# Altium PCB Digital_Ammeter.PcbDoc
Units mm, origin at the board's own origin, x right, y up, seen from the top; angles counter-clockwise.
Board outline 78.87 x 46.74 mm, 2 copper layers (Top Layer, Bottom Layer); 34 components, 99 nets, 139 pads, 6 vias.
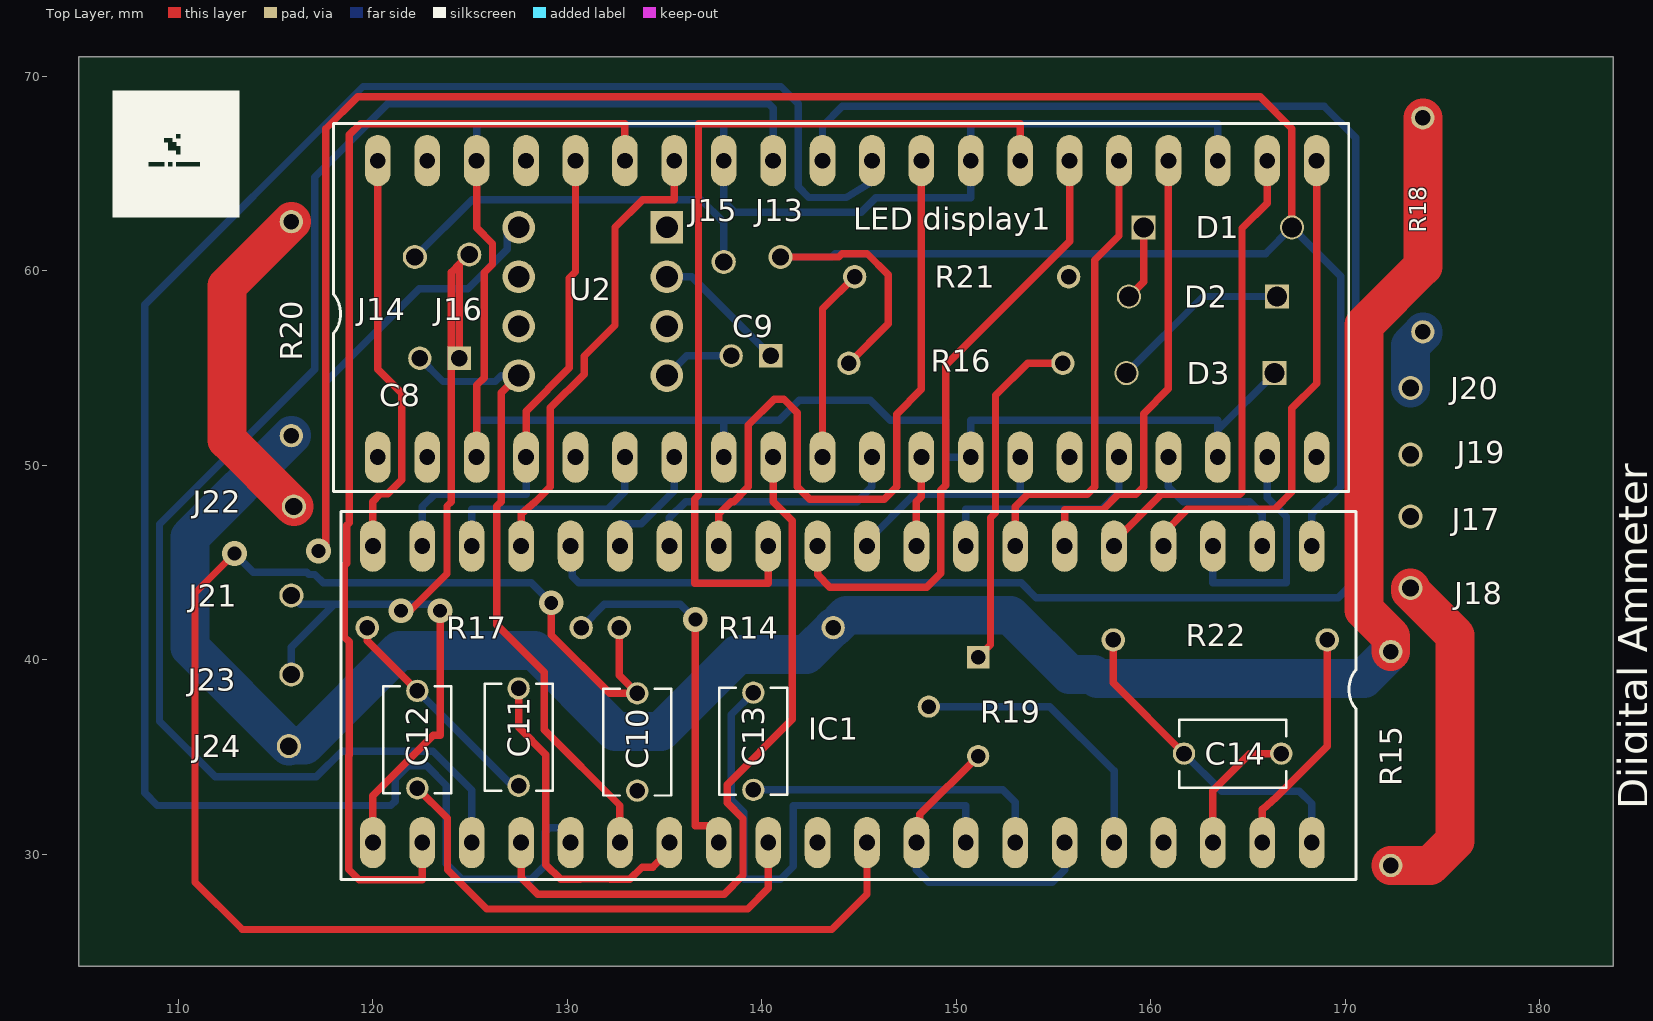
[diagram p0: Top Layer view]
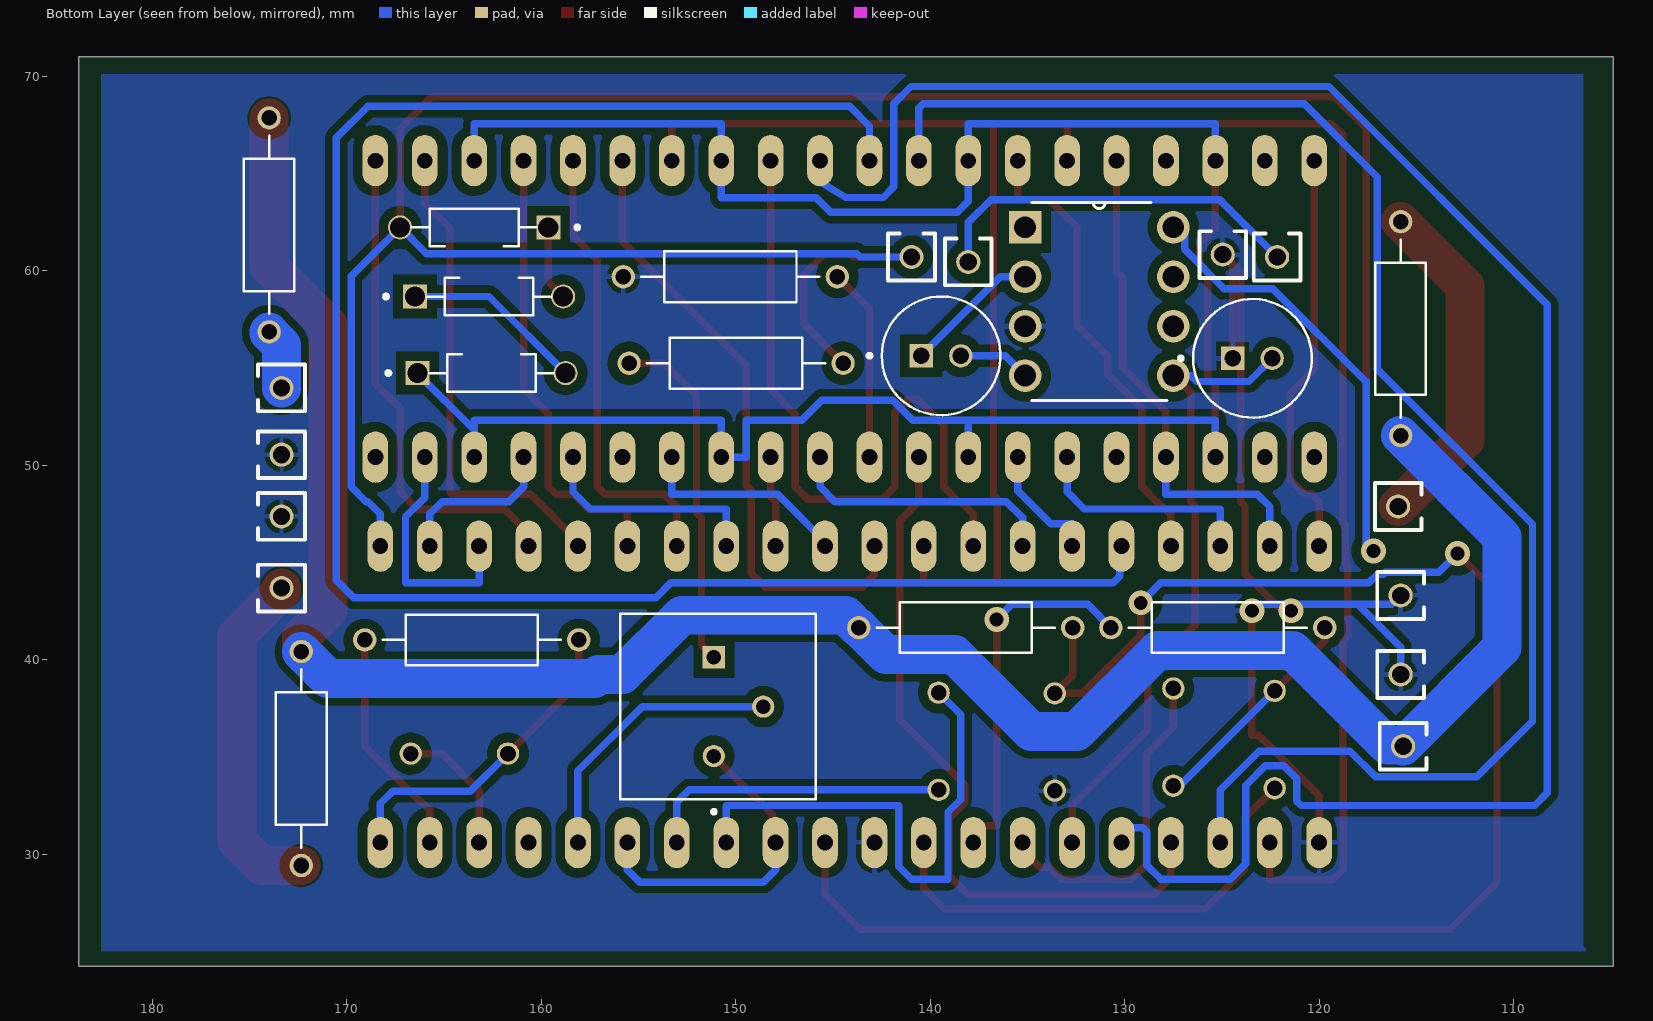
[diagram p1: Bottom Layer view, seen from below]
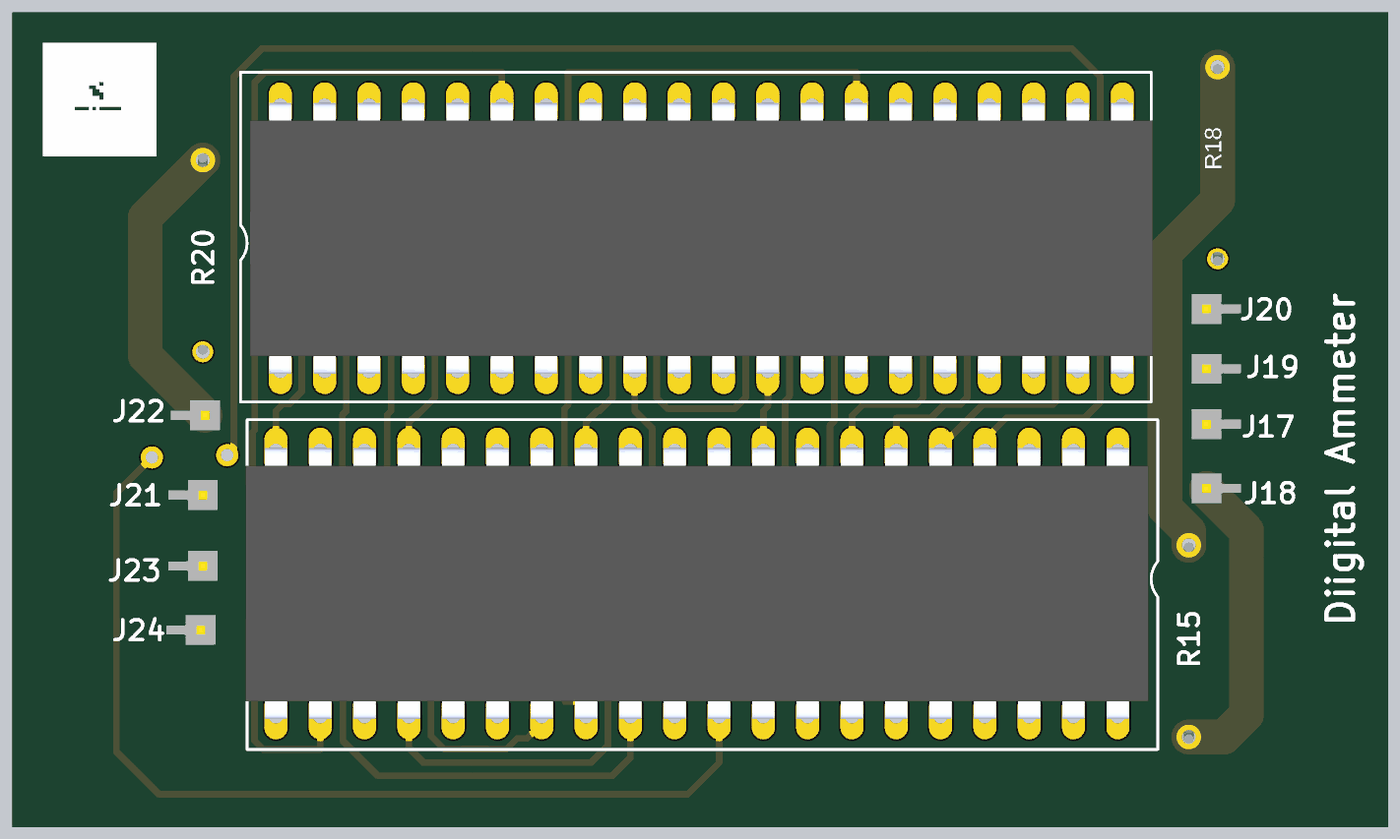
[diagram p2: 3D render of the assembled board from above, using the file's embedded part models]

## Layer stack, top to bottom
Top Solder: solder mask 0.0102, Solder Resist, Dk 3.5
Top Layer: signal copper 0.0356
Dielectric 1: dielectric 0.32, FR-4, Dk 4.8
Bottom Layer: signal copper 0.0356
Bottom Solder: solder mask 0.0102, Solder Resist, Dk 3.5

## Board outline
104.902,24.257 183.769,24.257 183.769,70.993 104.902,70.993

## Design rules (kind name [scope] priority, off if disabled: settings)
Clearance [All] p1: gap=0.5 ignorepadtopadclearanceinfootprint=FALSE except(0.381: Arc-Arc Arc-Track Arc-SMDPad Arc-THPad Arc-Via Arc-Fill Arc-Poly Arc-Region Arc-Text Track-Track Track-SMDPad Track-THPad Track-Via Track-Fill Track-Poly Track-Region Track-Text; 0.508: Arc-Hole Track-Hole SMDPad-Hole THPad-Hole Via-Hole Fill-Hole Poly-Hole Region-Hole Text-Hole)
HoleToHoleClearance [All] p1: gap=0.5 allowstackedmicrovias=TRUE
PolygonConnect [All] p1: connectstyle=Relief reliefconductorwidth=0.254 reliefentries=4 polygonreliefangle="90 Angle" airgapwidth=0.254
RoutingVias [All] p1: holewidth=0.711 width=1.27 viastyle="Through Hole" minholewidth=0.711 minwidth=1.27 maxholewidth=0.711 maxwidth=1.27
SilkToSolderMaskClearance [IsPad] p1 off: minsilkscreentomaskgap=0.254 clearancetoexposedcopper=FALSE
SolderMaskExpansion [All] p1: expansion=0.102 istentingtop=FALSE
Width [All] p1: maxlimit=3 minlimit=0.254 preferedwidth=0.381
28 further rules are at their usual default settings.

## Components (designator, comment, footprint, x,y, rotation, side; value= is the part's Value field where it differs from the comment)
C8 "100 uF" CAPPRD500W60D1250H2000 123.444,55.499 r0 top value=$0.77
C9 "100 uF" CAPPRD500W60D1250H2000 139.446,55.626 r0 top value=$0.77
C10 "10nF" CAPRB500W50L550T350H600 133.604,35.774 r90 top value=$0.51
C11 "0.22uF" CAPRB500W50L550T350H600 127.508,36.028 r90 top value=$0.51
C12 "0.47uF" CAPRB500W50L550T350H600 122.301,35.901 r90 top value=$0.51
C13 "100nF" CAPRB500W50L550T350H600 139.573,35.814 r90 top value=$0.51
C14 "100pF" CAPRB500W50L550T350H600 164.211,35.179 r180 top value=$0.51
D1 "1N4148" DIOAD829W49L456D191 163.449,62.23 r0 top value=$0.05
D2 "1N4148" DIOAD829W49L456D191 162.687,58.674 r180 top value=$0.05
D3 "1N4148" DIOAD829W49L456D191 162.56,54.737 r180 top value=$0.05
IC1 "ICL7107CPLZ" DIL40 144.145,38.227 r180 top value=$11.2
J13 "SWT" SAMTEC_MTMM-101-XX-X-S-XXX 140.97,60.706 r0 top
J14 "VCC" SAMTEC_MTMM-101-XX-X-S-XXX 122.174,60.706 r0 top
J15 "SWT" SAMTEC_MTMM-101-XX-X-S-XXX 138.049,60.452 r0 top
J16 "GND" SAMTEC_MTMM-101-XX-X-S-XXX 124.968,60.833 r0 top
J17 "GND" SAMTEC_MTMM-101-XX-X-S-XXX 173.355,47.371 r270 top
J18 "GND" SAMTEC_MTMM-101-XX-X-S-XXX 173.355,43.688 r270 top
J19 "GND" SAMTEC_MTMM-101-XX-X-S-XXX 173.355,50.546 r270 top
J20 "GND" SAMTEC_MTMM-101-XX-X-S-XXX 173.355,53.975 r270 top
J21 "GND" SAMTEC_MTMM-101-XX-X-S-XXX 115.824,43.307 r90 top
J22 "GND" SAMTEC_MTMM-101-XX-X-S-XXX 115.951,47.879 r90 top
J23 "OUT" SAMTEC_MTMM-101-XX-X-S-XXX 115.824,39.243 r90 top
J24 "IN" SAMTEC_MTMM-101-XX-X-S-XXX 115.697,35.56 r90 top
"LED display1" "" DIL40 144.399,58.039 r0 top
R14 "1M" RESAD1100W55L680D260 138.176,41.656 r180 top value=$0.05
R15 "0.01" RESAD1100W55L680D260 172.339,34.925 r90 top value=$0.05
R16 "15K" RESAD1100W55L680D260 149.987,55.245 r180 top value=$0.05
R17 "47K" RESAD1100W55L680D260 125.222,41.656 r180 top value=$0.05
R18 "0.1" RESAD1100W55L680D260 173.99,62.357 r90 top value=$0.05
R19 "10K" TRIM_3296P-1-502LF 151.13,37.592 r90 top value=$1.92
R20 "1" RESAD1100W55L680D260 115.824,57.023 r270 top value=$0.05
R21 "330E" RESAD1100W55L680D260 150.28,59.69 r180 top value=$0.05
R22 "100K" RESAD1100W55L680D260 163.576,41.021 r180 top value=$0.05
U2 "ICL7660SCPAZ" DIP254P762X533-8 135.128,54.61 r0 top value=$2.12

## Footprints (in the part's own frame and the unit in brackets; to place one, negate y for a bottom-side part, rotate by r counter-clockwise, add the part's x,y. Pads: shape width x height; smd on the part's side, far side on the other; paste and mask are expansions set on the pad)
CAPPRD500W60D1250H2000 [mm]
  round 1.2 hole 0.85: N(-1.016,0)
  rect 1.2x1.2 hole 0.85: P(1.016,0)
  body extent -2.52,-2.34 2.52,2.67, height 0.79
CAPRB500W50L550T350H600 [mm]
  round 1.15 hole 0.8: 1(-2.5,0) 2(2.5,0)
  silkscreen extent -2.75,-1.75 2.75,1.75, body extent -2.88,-1.91 2.62,1.59, height 0.19
DIL40 [mil]
  oval 52x104 hole 32: 1(-950,-300) 2(-850,-300) 3(-750,-300) 4(-650,-300) 5(-550,-300) 6(-450,-300) 7(-350,-300) 8(-250,-300) 9(-150,-300) 10(-50,-300) 11(50,-300) 12(150,-300) 13(250,-300) 14(350,-300) 15(450,-300) 16(550,-300) 17(650,-300) 18(750,-300) 19(850,-300) 20(950,-300) 21(950,300) 22(850,300) 23(750,300) 24(650,300) 25(550,300) 26(450,300) 27(350,300) 28(250,300) 29(150,300) 30(50,300) 31(-50,300) 32(-150,300) 33(-250,300) 34(-350,300) 35(-450,300) 36(-550,300) 37(-650,300) 38(-750,300) 39(-850,300) 40(-950,300)
  silkscreen extent -1040,-370 1015,375, body extent -1019,-306 1019,306, height 351
DIOAD829W49L456D191 [mm]
  round 1.238 hole 1.035 mask+0.102: A(3.81,0)
  rect 1.238x1.238 / inner round 1.238 / far side rect 1.238x1.238 hole 1.035: C(-3.81,0)
  body extent -4.29,-1 4.19,1, height 0.86
DIP254P762X533-8 [mil]
  rect 66x66 / inner round 66 / far side rect 66x66 hole 44: 1(0,300)
  round 66 hole 44: 2(0,200) 3(0,100) 4(0,0) 5(-300,0) 6(-300,100) 7(-300,200) 8(-300,300)
  body extent -306,-44 5,334, height 100
RESAD1100W55L680D260 [mm]
  round 1.2 hole 0.8: 1(-5.5,0) 2(5.5,0)
  body extent -5.9,-1.3 5.65,1.3, height 0.26
SAMTEC_MTMM-101-XX-X-S-XXX [mm]
  round 1.24 hole 0.89: 01(0,0)
  body extent -1,-1 1,1, height 1.85
TRIM_3296P-1-502LF [mm]
  rect 1.14x1.14 hole 0.74: 1(2.54,0)
  round 1.14 hole 0.74: 2(0,2.54) 3(-2.54,0)
  body extent -4.7,-5.25 4.83,6.3, height 1.72

## Part data
C8 C9: library part ECA2WM100B, "CAP ALUM 10UF 20% 450V RADIAL", Package="RADIAL-2 Panasonic", Availability="In Stock", Check_prices=https://www.snapeda.com/parts/ECA-2WM100B/Panasonic/view-part/2313535/?ref=eda, MF=Panasonic, MP=ECA-2WM100B, Price=None, Purchase-URL=https://pricing.snapeda.com/search/part/ECA-2WM100B/?ref=eda, SnapEDA_Link=https://www.snapeda.com/parts/ECA-2WM100B/Panasonic/view-part/2313535/?ref=snap, Supplier 1=Mouser, Supplier 2=Mouser
C10 C11 C12 C13 C14: library part FG26X7R2E104KNT06, "0.1ÂµF Â±10% 250V Ceramic Capacitor X7R Radial", Package="Radial TDK", Availability="In Stock", Check_prices=https://www.snapeda.com/parts/FG26X7R2E104KNT06/TDK/view-part/?ref=eda, MF=TDK, MP=FG26X7R2E104KNT06, Price=None, Purchase-URL=https://pricing.snapeda.com/search/part/FG26X7R2E104KNT06/?ref=eda, SnapEDA_Link=https://www.snapeda.com/parts/FG26X7R2E104KNT06/TDK/view-part/?ref=snap, Supplier 1=Mouser
D1 D2 D3: "Diode Standard 75V 200mA Surface Mount SOD-523F", Package="AXIAL LEAD-2 ON Semiconductor", Availability="In Stock", Check_prices=https://www.snapeda.com/parts/1N4148/Onsemi/view-part/?ref=eda, MF="ON Semiconductor", MP=1N4148, Price=None, Purchase-URL=https://pricing.snapeda.com/search/part/1N4148/?ref=eda, SnapEDA_Link=https://www.snapeda.com/parts/1N4148/Onsemi/view-part/?ref=snap, Supplier 1="Arrow Electronics", Supplier 2=Rs
IC1: "Display Driver 3.5 Digit 40-DIP", Package="DIP-40 Intersil", Supplier Part Number 1=968-ICL7107CPLZ, ComponentLink1Description="New link", Digi-Key_Part_Number=ICL7107CPLZ-ND, Digi-Key_Purchase_URL=https://www.digikey.in/product-detail/en/renesas-electronics-america-inc/ICL7107CPLZ/ICL7107CPLZ-ND/821475?utm_source=snapeda&utm_medium=aggregator&utm_campaign=symbol, MF="Renesas Electronics", MP=ICL7107CPLZ, SnapEDA_Link=https://www.snapeda.com/parts/ICL7107CPLZ/Renesas%20Electronics%20America%20Inc./view-part/45306/?ref=snap, Supplier 1=Mouser
J13 J14 J15 J16 J17 J18 J19 J20 J21 J22 J23 J24: library part MTMM-101-XX-X-S-XXX, "Connector Header position", Package=None, Availability=Unavailable, MP=MTMM-101-XX-X-S-XXX, Price=None
"LED display1": library part "7 segmented display", "DISPLAY 7SEG 0.56\" SGL GRN 10DIP x4", part name=LDSC512RI, Supplier Part Number 1=696-LDS-C512RI, check price=https://www.snapeda.com/parts/LDSC512RI/Lumex%20Optoelectronics/view-part/?ref=search&t=LDSC512RI, ComponentLink1Description=link, ComponentLink1URL=https://www.snapeda.com/parts/LDSC512RI/Lumex%20Optoelectronics/view-part/?ref=search&t=LDSC512RI, MP="Lumex Optoelectronics", Supplier 1=Mouser
R14 R15 R16 R17 R18 R20 R21 R22: library part MFR-25FBF52-1K, "1.78 kOhms Â±1% 0.25W, 1/4W Through Hole Resistor Axial - Metal Film", Package="Axial Yageo", Supplier Part Number 1=588-EY470KE, Availability="In Stock", Check_prices=https://www.snapeda.com/parts/MFR-25FBF52-1K/Yageo/view-part/?ref=eda, MF=Yageo, MP=MFR-25FBF52-1K, Price=None, Purchase-URL=https://pricing.snapeda.com/search/part/MFR-25FBF52-1K/?ref=eda, SnapEDA_Link=https://www.snapeda.com/parts/MFR-25FBF52-1K/Yageo/view-part/?ref=snap, Supplier 1=Mouser
R19: library part 3296P-1-502LF, "Trimmer Cermet 5 kOhm linear 500 mW", Package="NON-STANDARD-3 Bourns", Availability="In Stock", Check_prices=https://www.snapeda.com/parts/3296P-1-502LF/Bourns/view-part/?ref=eda, MF=Bourns, MP=3296P-1-502LF, Price=None, Purchase-URL=https://pricing.snapeda.com/search/part/3296P-1-502LF/?ref=eda, SnapEDA_Link=https://www.snapeda.com/parts/3296P-1-502LF/Bourns/view-part/?ref=snap, Supplier 1=Rs
U2: "Charge Pump Switching Regulator IC Positive or Negative Fixed -Vin, 2Vin 1 Output 45mA 8-DIP (0.300, 7.62mm)", Package="DIP-8 Renesas / Intersil", Supplier Part Number 1=9215585P, Availability="In Stock", Check_prices=https://www.snapeda.com/parts/ICL7660SCPAZ/Renesas/view-part/?ref=eda, MF="Renesas Electronics America Inc", MP=ICL7660SCPAZ, Price=None, Purchase-URL=https://pricing.snapeda.com/search/part/ICL7660SCPAZ/?ref=eda, SnapEDA_Link=https://www.snapeda.com/parts/ICL7660SCPAZ/Renesas/view-part/?ref=snap, Supplier 1=Rs

## Via types
v1: diameter 1.27, hole 0.711, Top Layer to Bottom Layer, 6 vias

## Nets (pads, with @x,y where several pads share a name; then routed paths per layer and width w, separated by ;. In a path a pad name is that pad's centre, name@x,y a point inside that pad or via, vN(x,y) a via of type N, cw(c..) or ccw(c..) an arc to the next point about the centre after c; other vN are vias at no path point)
+VCC: D1.A IC1.1 J13.01 R16.2 U2.8 | length 157.2
  Top Layer w0.381: v1@117.475,45.466 117.602,45.593 117.602,67.31 119.228,68.936 165.633,68.936 167.259,67.31 D1.A ; J13.01 143.967,60.706 144.145,60.884 145.415,60.884 146.507,59.792 146.507,57.265 R16.2
  Bottom Layer w0.381: v1@117.475,45.466 117.602,45.593 117.602,54.284 122.398,59.08 124.905,59.08 126.924,61.099 126.924,62.23 U2.8 ; J13.01 143.612,60.706 143.789,60.884 165.913,60.884 D1.A 169.774,59.715 169.774,48.895 169.012,48.133 168.91,48.133 168.275,47.498 IC1.1
  other v1: 117.221,45.593
GND: C8.P C10.1 IC1.21 IC1.30 J16.01 J17.01 J19.01 J21.01 J23.01 R21.1 U2.3 | length 51.4
  Top Layer w0.381: IC1.21 120.015,33.02 123.114,36.119 123.469,36.119 v1(123.469,42.52) ; v1(121.463,42.52) 121.92,42.52 123.825,44.425 123.825,47.904 124.054,48.133 124.054,59.919 124.46,60.325 ; C8.P 124.46,60.325 ; J16.01 124.46,60.325
  Bottom Layer w0.381: J23.01 115.824,40.64 118.034,42.85 ; J21.01 116.281,42.85 118.034,42.85 ; v1(121.463,42.52) v1@121.133,42.85 ; v1(123.469,42.52) 123.139,42.85 v1@121.133,42.85 ; 118.034,42.85 v1@121.133,42.85
NetC1_N: 
NetC2_N: 
NetC2_P: 
NetC3_1: 
NetC3_2: 
NetC4_1: 
NetC5_1: 
NetC5_2: 
NetC6_1: 
NetC6_2: 
NetC7_1: 
NetC7_2: 
NetC8_N: C8.N IC1.26 U2.5 | length 32.8
  Top Layer w0.381: U2.5 126.619,53.721 126.619,48.133 126.39,47.904 126.39,41.808 128.829,39.37 128.829,36.398 132.715,32.512 IC1.26
  Bottom Layer w0.381: C8.N 123.622,54.305 126.314,54.305 126.619,54.61 U2.5
NetC9_N: C9.N U2.4 | length 3.7
  Bottom Layer w0.381: U2.4 136.144,55.626 C9.N
NetC9_P: C9.P U2.2 | length 7
  Bottom Layer w0.381: U2.2 136.398,59.69 C9.P
NetC10_2: C10.2 IC1.31 R14.2 | length 85.4
  Top Layer w0.381: v1(112.903,45.466) 110.871,43.434 110.871,28.575 113.309,26.137 143.612,26.137 145.415,27.94 IC1.31 ; v1(129.184,42.926) 129.184,41.275 132.185,38.274 C10.2 132.676,39.202 R14.2
  Bottom Layer w0.381: v1@113.073,45.636 v1(112.903,45.466) 113.87,44.499 116.609,44.499 116.721,44.386 117.03,44.386 117.462,43.955 128.145,43.955 128.15,43.96 v1(129.184,42.926)
NetC11_1: C11.1 C12.2 R17.2 | length 11.5
  Top Layer w0.381: R17.2 119.722,40.98 C12.2
  Bottom Layer w0.381: C12.2 127.174,33.528 C11.1
NetC11_2: C11.2 IC1.27 | length 17.3
  Top Layer w0.381: C11.2 127.508,36.525 128.905,35.128 128.905,29.474 129.665,28.715 130.685,28.715 130.702,28.731 132.188,28.731 132.205,28.715 133.225,28.715 133.848,29.337 134.391,29.337 135.255,30.201 IC1.27
NetC12_1: C12.1 IC1.29 | length 25
  Top Layer w0.381: C12.1 123.85,31.852 123.85,29.21 125.87,27.191 139.277,27.191 140.335,28.248 IC1.29
NetC13_1: C13.1 IC1.34 | length 15.8
  Bottom Layer w0.381: C13.1 152.4,33.314 153.035,32.679 IC1.34
NetC13_2: C13.2 IC1.33 | length 27.1
  Bottom Layer w0.381: C13.2 138.426,37.168 138.426,32.839 139.09,32.175 139.09,28.715 140.97,28.715 141.63,29.375 141.63,32.512 150.495,32.512 IC1.33
NetC14_1: C14.1 IC1.38 | length 7
  Top Layer w0.381: IC1.38 163.195,33.274 165.1,35.179 C14.1
NetC14_2: C14.2 IC1.40 R22.2 | length 17
  Top Layer w0.381: R22.2 158.076,38.814 C14.2
  Bottom Layer w0.381: C14.2 163.641,33.249 167.64,33.249 168.275,32.614 IC1.40
NetD1_C: D1.C D2.A | length 3.9
  Top Layer w0.381: D2.A 159.639,59.436 D1.C
NetD2_C: D2.C D3.A | length 9.4
  Bottom Layer w0.381: D3.A 162.687,58.674 D2.C
NetD3_C: "LED display1.3" "LED display1.8" "LED display1.13" "LED display1.18" "LED display1.23" "LED display1.28" "LED display1.33" "LED display1.38" D3.C | length 118.8
  Top Layer w0.381: 125.349,50.419 125.349,54.127 125.73,54.508 125.73,59.91 126.162,60.342 126.162,61.392 125.349,62.205 125.349,65.659
  Bottom Layer w0.381: 125.349,50.419 125.349,52.324 138.049,52.311 ; 125.349,65.659 125.349,67.564 138.049,67.564 138.049,65.659 138.049,63.576 138.62,63.005 145.123,63.005 145.872,63.754 150.749,63.754 150.749,65.659 150.749,67.564 163.449,67.564 163.449,65.659 ; 138.049,50.419 138.049,52.311 ; 163.449,50.419 163.449,51.816 ; D3.C 163.449,51.816 ; 138.049,52.311 140.9,52.311 141.929,53.34 145.574,53.34 146.602,52.311 149.454,52.311 149.454,50.419 150.749,50.419 150.749,52.324 163.449,52.324 163.449,51.816
NetIC1_2: "LED display1.17" IC1.2 | length 8.6
  Bottom Layer w0.381: 160.909,50.419 160.909,48.895 161.671,48.133 165.1,48.133 165.735,47.498 IC1.2
NetIC1_3: "LED display1.19" IC1.3 | length 12.6
  Bottom Layer w0.381: IC1.3 163.195,43.955 166.98,43.955 166.98,47.346 165.989,48.336 165.989,50.419
NetIC1_4: "LED display1.21" IC1.4 | length 25.7
  Top Layer w0.381: IC1.4 160.655,46.507 161.887,47.739 166.37,47.739 167.259,48.628 167.259,52.934 168.529,54.204 168.529,65.659
NetIC1_5: "LED display1.22" IC1.5 | length 25.4
  Top Layer w0.381: IC1.5 158.115,46.076 160.541,48.501 164.579,48.501 164.694,48.616 164.694,62.179 165.989,63.475 165.989,65.659
NetIC1_6: "LED display1.24" IC1.6 | length 23.7
  Top Layer w0.381: IC1.6 155.575,47.727 157.556,47.727 158.331,48.501 159.245,48.501 159.639,48.895 159.639,52.654 160.909,53.924 160.909,65.659
NetIC1_7: "LED display1.25" IC1.7 | length 23.8
  Top Layer w0.381: IC1.7 153.035,47.866 153.67,48.501 156.731,48.501 157.124,48.895 157.124,60.554 158.369,61.798 158.369,65.659
NetIC1_8: "LED display1.16" IC1.8 | length 11.9
  Bottom Layer w0.381: IC1.8 150.495,47.752 157.48,47.752 158.369,48.641 158.369,50.419
NetIC1_9: "LED display1.12" IC1.9 | length 4.7
  Top Layer w0.381: IC1.9 147.955,48.133 148.209,48.387 148.209,50.419
NetIC1_10: "LED display1.14" IC1.10 | length 11
  Bottom Layer w0.381: IC1.10 145.415,46.076 147.853,48.514 153.289,48.514 153.289,50.419
NetIC1_11: "LED display1.26" IC1.11 | length 32.3
  Top Layer w0.381: IC1.11 142.875,44.374 143.51,43.739 148.488,43.739 149.2,44.45 149.2,48.717 149.454,48.971 149.454,55.143 155.829,61.519 155.829,65.659
NetIC1_12: "LED display1.27" IC1.12 | length 47.8
  Top Layer w0.381: IC1.12 140.335,43.942 136.55,43.942 136.55,48.26 136.754,48.463 136.754,67.564 153.289,67.564 153.289,65.659
NetIC1_13: "LED display1.29" IC1.13 | length 37
  Top Layer w0.381: IC1.13 137.795,47.498 138.43,48.133 138.557,48.133 139.319,48.895 139.319,52.07 140.64,53.391 141.148,53.391 141.834,52.705 141.834,48.895 142.469,48.26 146.304,48.26 146.939,48.895 146.939,52.629 148.209,53.899 148.209,65.659
NetIC1_14: "LED display1.11" IC1.14 | length 14
  Bottom Layer w0.381: IC1.14 135.255,47.295 136.093,48.133 144.907,48.133 145.669,48.895 145.669,50.419
NetIC1_15: "LED display1.7" IC1.15 | length 6.4
  Bottom Layer w0.381: IC1.15 132.715,46.99 133.807,46.99 135.509,48.692 135.509,50.419
NetIC1_16: "LED display1.31" IC1.16 | length 95.7
  Bottom Layer w0.381: IC1.16 130.261,45.761 130.261,44.292 130.598,43.955 153.34,43.955 154.102,43.193 169.643,43.193 170.536,44.086 170.536,66.827 168.91,68.453 144.145,68.453 143.129,67.437 143.129,65.659
NetIC1_17: "LED display1.34" IC1.17 | length 24.1
  Top Layer w0.381: IC1.17 127.635,47.498 128.372,48.133 129.134,48.895 129.134,52.948 130.874,54.688 130.874,55.618 132.461,57.205 132.461,62.23 133.883,63.652 135.509,63.652 135.509,65.659
NetIC1_18: "LED display1.6" IC1.18 | length 11.9
  Bottom Layer w0.381: IC1.18 125.095,47.752 132.08,47.752 132.969,48.641 132.969,50.419
NetIC1_19: "LED display1.4" "LED display1.36" IC1.19 | length 25.8
  Top Layer w0.381: 127.889,50.419 127.889,52.781 130.112,55.004 130.112,59.625 130.429,59.943 130.429,65.659
  Bottom Layer w0.381: IC1.19 122.555,47.879 123.19,48.514 127.889,48.514 127.889,50.419
NetIC1_20: "LED display1.40" IC1.20 | length 21.2
  Top Layer w0.381: IC1.20 120.015,48.133 120.409,48.527 120.779,48.527 121.501,49.248 121.501,53.701 120.269,54.933 120.269,65.659
NetIC1_22: "LED display1.35" IC1.22 | length 60.2
  Top Layer w0.381: IC1.22 122.555,28.702 119.304,28.702 118.783,29.223 118.783,35.063 118.801,35.08 118.801,40.921 118.55,41.171 118.55,44.835 118.681,44.966 118.681,46.916 118.801,47.035 118.801,66.985 119.38,67.564 132.969,67.564 132.969,65.659
NetIC1_23: "LED display1.32" IC1.23 | length 80.5
  Bottom Layer w0.381: IC1.23 125.095,33.306 123.091,35.31 118.431,35.31 117.11,33.989 111.907,33.989 109.046,36.85 109.046,46.967 117.018,54.939 117.018,64.821 120.777,68.58 140.366,68.58 140.589,68.357 140.589,65.659
NetIC1_24: "LED display1.9" IC1.24 | length 37.6
  Top Layer w0.381: IC1.24 127.635,28.798 128.48,27.953 138.067,27.953 139.04,28.925 139.04,31.826 138.224,32.642 138.224,33.586 141.58,36.942 141.58,47.142 140.589,48.133 140.589,50.419
NetIC1_25: "LED display1.30" IC1.25 | length 104.4
  Bottom Layer w0.381: IC1.25 130.175,30.942 129.741,31.376 129.09,31.376 128.867,31.153 128.867,29.436 128.145,28.715 124.585,28.715 123.787,29.513 123.787,33.536 122.776,34.548 121.826,34.548 121.154,33.876 121.154,32.735 120.931,32.512 108.935,32.512 108.284,33.164 108.284,58.246 119.507,69.469 140.995,69.469 141.884,68.58 141.884,64.313 142.43,63.767 144.348,63.767 145.669,64.567 145.669,65.659
NetIC1_28: IC1.28 R17.1 | length 19.4
  Top Layer w0.381: v1(136.591,42.072) 136.591,31.459 137.795,31.459 IC1.28
  Bottom Layer w0.381: R17.1 131.916,42.85 135.814,42.85 v1(136.591,42.072)
NetIC1_32: IC1.32 IC1.35 R19.3 | length 16.7
  Top Layer w0.381: IC1.32 148.135,30.787 148.135,32.057 R19.3
  Bottom Layer w0.381: IC1.32 147.955,29.21 148.59,28.575 154.94,28.575 155.575,29.21 IC1.35
NetIC1_36: IC1.36 R19.2 | length 14.6
  Bottom Layer w0.381: R19.2 154.813,37.592 158.115,34.29 IC1.36
NetIC1_39: IC1.39 R22.1 | length 11.8
  Top Layer w0.381: IC1.39 165.735,32.309 166.46,32.944 169.076,35.56 R22.1
NetIC_2: 
NetIC_3: 
NetIC_4: 
NetIC_5: 
NetIC_6: 
NetIC_7: 
NetIC_8: 
NetIC_9: 
NetIC_10: 
NetIC_11: 
NetIC_12: 
NetIC_13: 
NetIC_14: 
NetIC_15: 
NetIC_16: 
NetIC_17: 
NetIC_18: 
NetIC_19: 
NetIC_20: 
NetIC_22: 
NetIC_23: 
NetIC_24: 
NetIC_25: 
NetIC_28: 
NetIC_36: 
NetIC_39: 
NetJ2_01: 
NetJ6_01: 
NetJ8_01: 
NetJ10_01: 
NetJ11_01: 
NetJ14_01: J14.01 J15.01 | length 19.6
  Bottom Layer w0.381: J14.01 125.12,63.652 136.881,63.652 138.049,62.484 J15.01
NetJ18_01: J18.01 R15.1 | length 17.8
  Top Layer w2: R15.1 174.371,29.425 175.641,30.695 175.641,41.261 173.355,43.547 J18.01
NetJ20_01: J20.01 R18.1 | length 3.1
  Bottom Layer w2: J20.01 173.355,56.168 173.99,56.803 R18.1
NetJ22_01: J22.01 R20.1 | length 17.4
  Top Layer w2: R20.1 112.522,59.221 112.522,51.308 J22.01
NetJ24_01: J24.01 R14.1 R15.2 R18.2 R20.2 | length 114.3
  Top Layer w2: R15.2 172.339,41.195 170.974,42.56 170.974,57.208 173.99,60.224 R18.2
  Bottom Layer w2: R20.2 110.617,46.316 110.617,40.64 J24.01 115.743,35.606 116.505,35.606 121.383,40.484 128.318,40.484 132.484,36.318 134.811,36.318 138.763,40.27 142.29,40.27 R14.1 143.73,41.656 144.365,42.291 152.781,42.291 155.829,39.243 157.052,39.243 157.255,39.04 170.954,39.04 R15.2
"NetLED display1_10": "LED display1.10" R21.2 | length 10
  Top Layer w0.381: 143.129,50.419 143.129,58.039 R21.2
"NetLED display_3": 
"NetLED display_8": 
"NetLED display_13": 
"NetLED display_15": 
"NetLED display_18": 
NetR8_1: 
NetR16_1: R16.1 R19.1 | length 18
  Top Layer w0.381: R19.1 151.765,40.767 151.765,47.295 152.019,47.549 152.019,53.594 153.67,55.245 R16.1
pads on no net: "LED display1.1" "LED display1.2" "LED display1.5" "LED display1.15" "LED display1.20" "LED display1.37" "LED display1.39" IC1.37 U2.1 U2.6 U2.7

## Polygon pours and split planes (outlines as drawn)
GND on Bottom Layer "GND_L02_P000" (solid, remove dead copper, pour order 0): 182.626,70.104 182.626,25.019 106.172,25.019 106.426,25.273 106.426,70.104

## Silkscreen, mask and mechanical layers (free items; w line width, h text height)
Top Overlay:
  region: 113.157,67.818 113.157,67.615 113.157,62.738 106.655,62.738 106.655,69.24 113.157,69.24 hole: 109.703,66.802 109.296,66.802 109.296,66.599 109.499,66.599 109.499,66.396 109.499,66.192 109.906,66.192 109.906,65.989 110.109,65.989 110.109,66.396 109.906,66.396 109.906,66.599 109.703,66.599 hole: 111.125,65.583 109.906,65.583 109.906,65.38 111.125,65.38 hole: 109.703,65.583 109.499,65.583 109.499,65.38 109.703,65.38 hole: 109.296,65.583 108.483,65.583 108.483,65.38 109.296,65.38 hole: 110.109,67.005 109.906,67.005 109.906,66.802 110.109,66.802
  text "Diigital Ammeter" at 185.547,32.33 h1.52 r90
Top Component Outline:
  lines w0.125: 104.775,70.866 183.769,70.866 183.769,24.384 104.902,24.384 104.902,70.993
Bottom Component Outline:
  lines w0.125: 104.902,24.257 183.642,24.257 183.642,70.866 104.902,70.866 104.902,24.257